# EAGLE board driver LF (EAGLE 7.6.0)
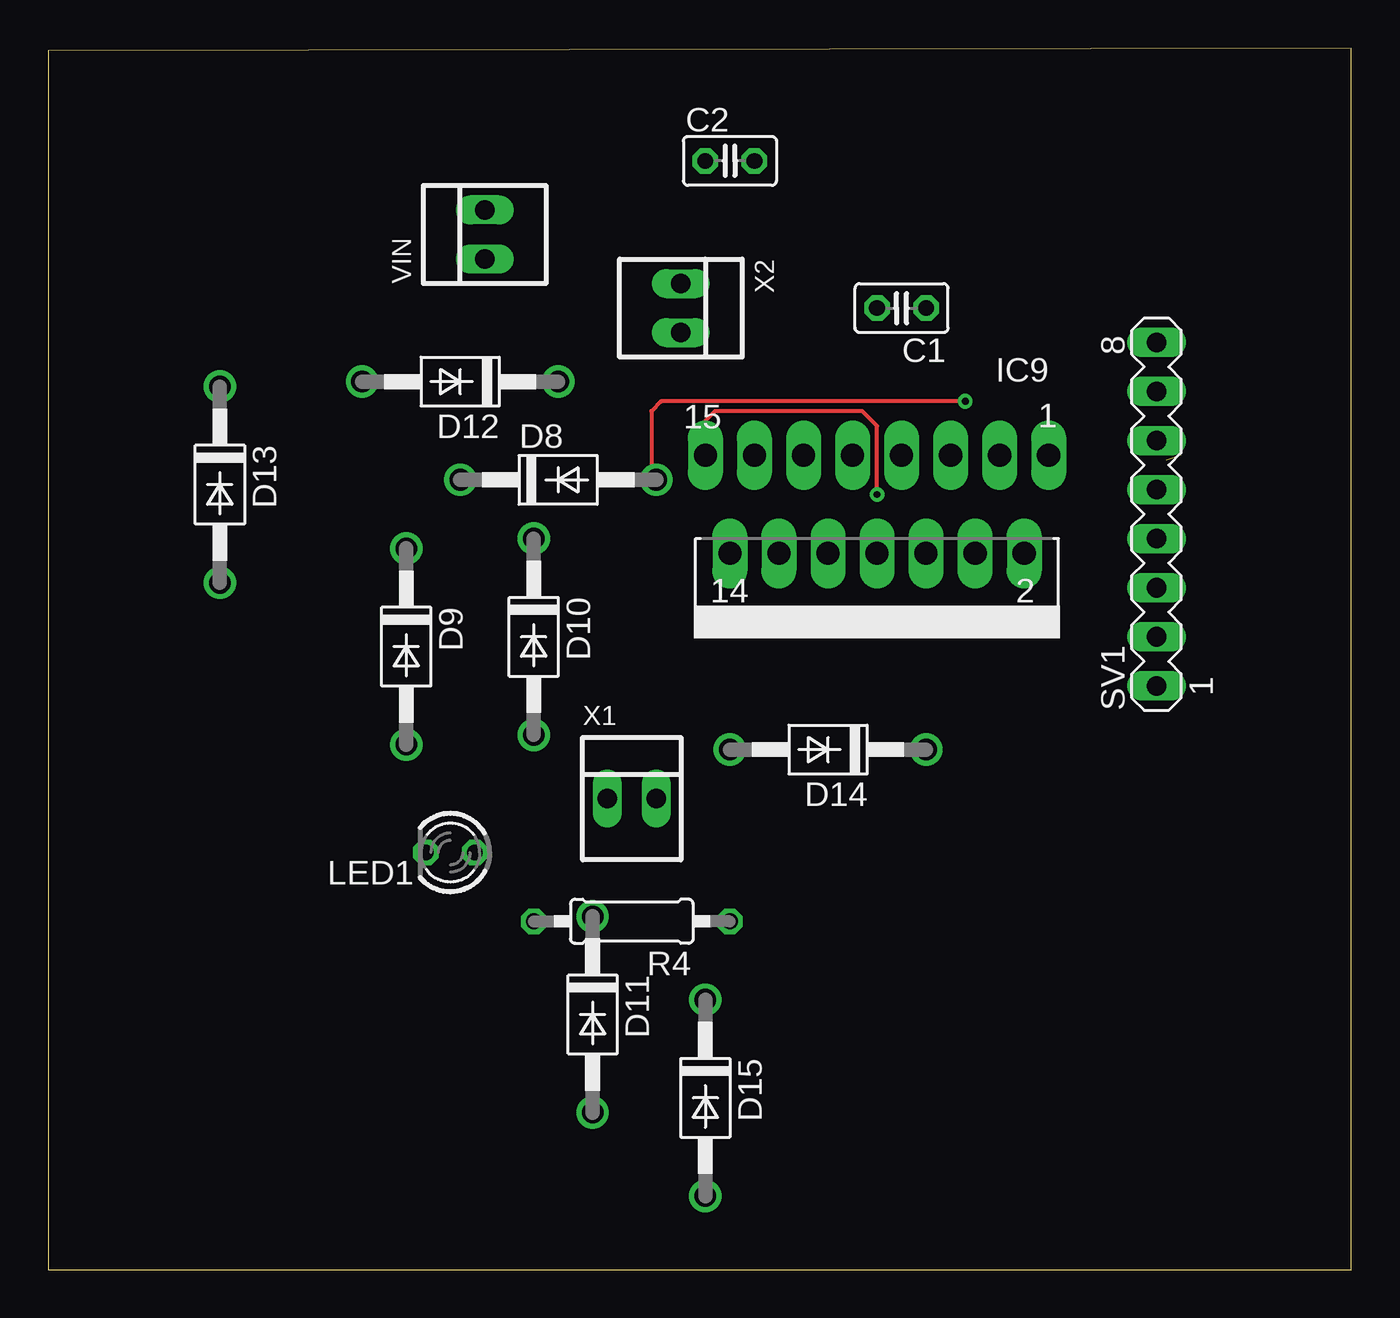
[diagram p0: board, top side]
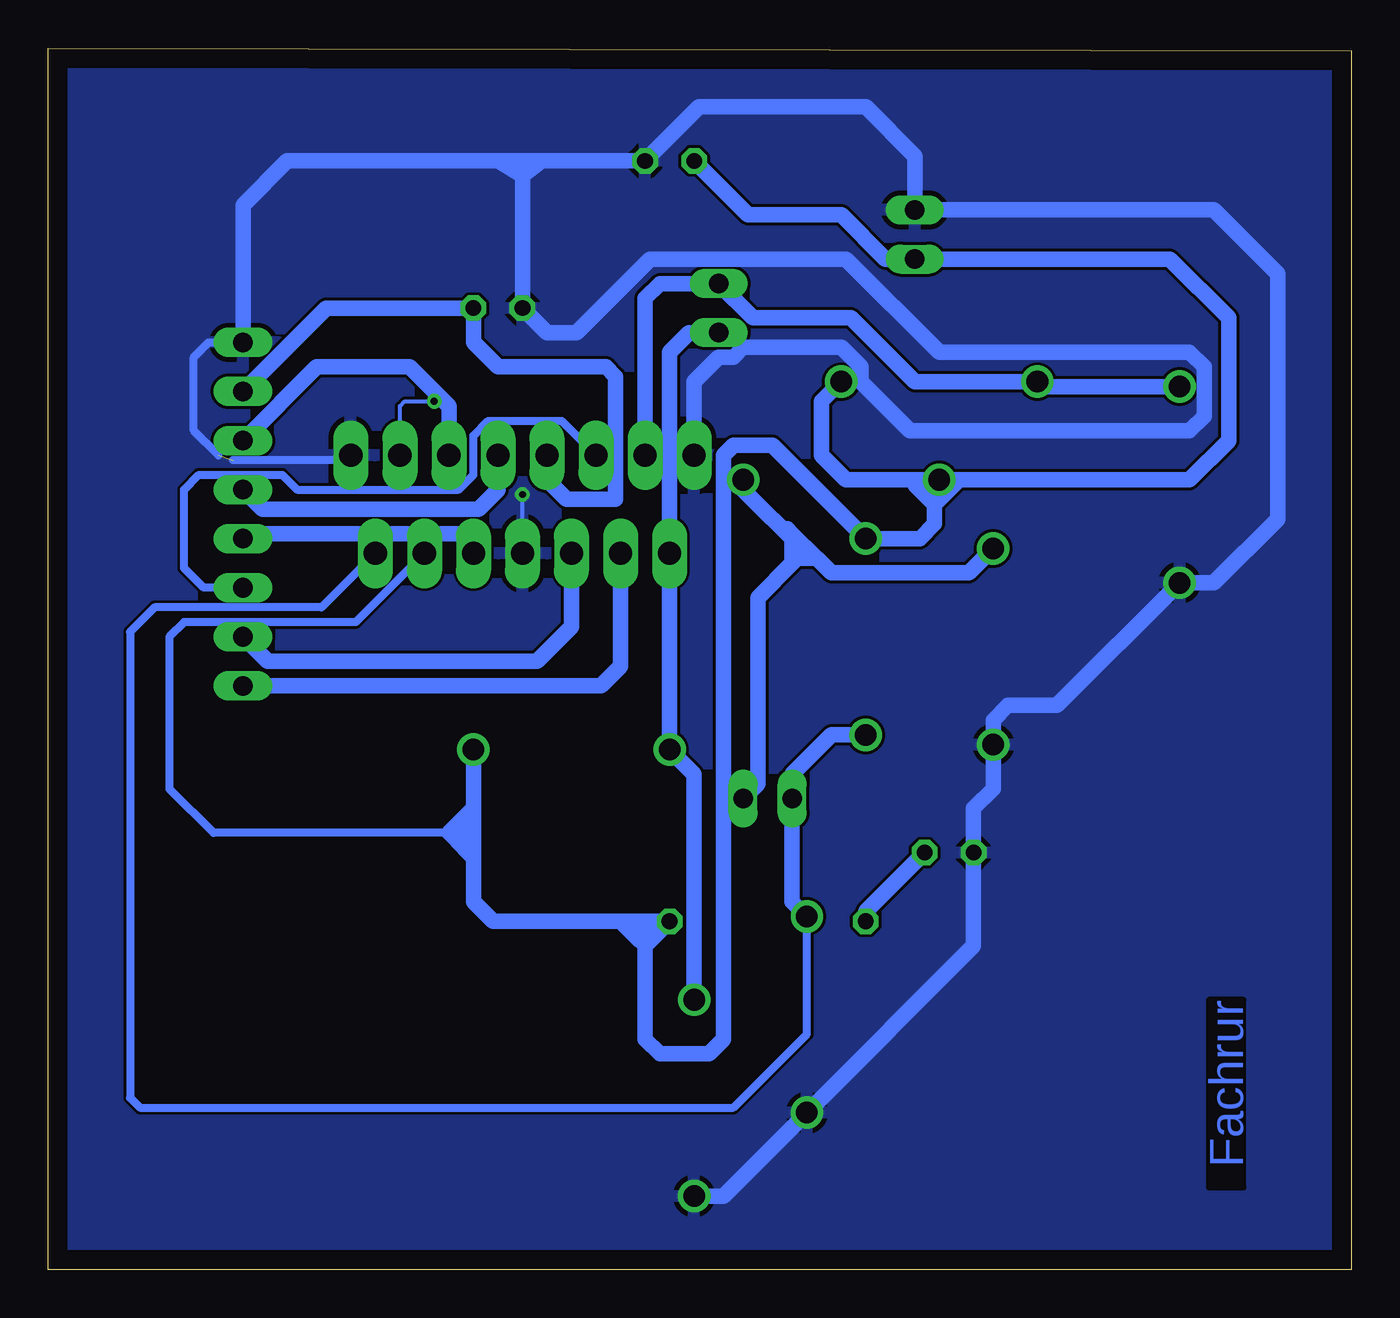
[diagram p1: board, bottom side, seen from below]

Size 67.49 x 63.24 mm. Coordinates in mm from the lower left corner, seen from the top.
Outline: 0,0 67.49,0 67.49,63.24 0,63.11 0,0
Copper layers (1*16): Top 0.035mm / dielectric 1.5mm / Bottom 0.035mm
Design rules "default": minimum track width 6mil, minimum drill 0.35mm, track to track 6mil, track to pad 6mil, pad to pad 6mil, via to via 6mil, smd to smd 6mil, copper to edge 40mil, drill to drill 6mil, minimum pad ring 10mil, minimum via ring 8mil, stop-mask expansion 4mil, vias tented up to drill 0mil, thermal gap 10mil

## Footprints (pad centres in the part's own frame; a part is rotated, then mirrored left to right if it is on the bottom)
C025-025X050 = drill 0.813 octagon: 1 -1.27,0; 2 1.27,0
DO41-10 = drill 1.118: A 5.08,0; C -5.08,0
MULTIWATT-15 = drill 1.2 long: 1 -8.89,-7.62; 2 -7.62,-2.54; 3 -6.35,-7.62; 4 -5.08,-2.54; 5 -3.81,-7.62; 6 -2.54,-2.54; 7 -1.27,-7.62; 8 0,-2.54; 9 1.27,-7.62; 10 2.54,-2.54; 11 3.81,-7.62; 12 5.08,-2.54; 13 6.35,-7.62; 14 7.62,-2.54; 15 8.89,-7.62
LED3MM = drill 0.813 octagon: A -1.27,0; K 1.27,0
0207/10 = drill 0.813 octagon: 1 -5.08,0; 2 5.08,0
MA08-1 = drill 1.016 long: 1 -8.89,0; 2 -6.35,0; 3 -3.81,0; 4 -1.27,0; 5 1.27,0; 6 3.81,0; 7 6.35,0; 8 8.89,0
22-23-2021 = drill 1 long: 1 -1.27,0; 2 1.27,0

## Placement (x,y rotation side)
C1  100nF  [C025-025X050]  44.2,49.78 180 top
C2  100nF  [C025-025X050]  35.31,57.4 0 top
D8  1N4004  [DO41-10]  26.42,40.89 0 top
D9  1N4004  [DO41-10]  18.54,32.26 270 top
D10  1N4004  [DO41-10]  25.15,32.77 270 top
D11  1N4004  [DO41-10]  28.19,13.21 270 top
D12  1N4004  [DO41-10]  21.34,45.97 180 top
D13  1N4004  [DO41-10]  8.89,40.64 270 top
D14  1N4004  [DO41-10]  40.39,26.92 180 top
D15  1N4004  [DO41-10]  34.04,8.89 270 top
IC9  L298  [MULTIWATT-15]  42.93,34.54 180 top
LED1  [LED3MM]  20.83,21.59 180 top
R4  330  [0207/10]  30.23,18.03 180 top
SV1  [MA08-1]  57.4,39.12 90 top
VIN  22-23-2021  [22-23-2021]  22.61,53.59 90 top
X1  22-23-2021  [22-23-2021]  30.23,24.38 0 top
X2  22-23-2021  [22-23-2021]  32.77,49.78 270 top

## Library data of the parts
C1 C2 R4 = rcl
D8-D15 = diode
IC9 = st-microelectronics
LED1 = led
SV1 = con-lstb; OC_FARNELL: unknown; OC_NEWARK: unknown
VIN X1 X2 = con-molex; MF: MOLEX; MPN: 22-23-2021; OC_FARNELL: 1462926; OC_NEWARK: 25C3832

## Nets
GND: C1.2 C2.2 D9.A D11.A D13.A D15.A IC9.1 IC9.8 IC9.15 LED1.K SV1.8 VIN.2
N$1: IC9.5 SV1.6
N$3: IC9.7 SV1.5
N$5: IC9.12 SV1.1
N$8: IC9.10 SV1.2
N$16: IC9.6 SV1.4
N$17: IC9.11 SV1.3
N$44: LED1.A R4.2
N$204: D8.A D9.C IC9.3 X1.2
N$205: D10.A D11.C IC9.2 X1.1
N$206: D12.A D13.C IC9.13 X2.1
N$207: D14.A D15.C IC9.14 X2.2
VCC: C1.1 IC9.9 SV1.7
VDD: C2.1 D8.C D10.C D12.C D14.C IC9.4 R4.1 VIN.1

## Tracks (layer width: path | path; a pad name or v marks a point on that pad's centre or on a via)
GND  (via drill 0.35)  (1 unrouted)
  Top 0.203: IC9.15 34.04,43.94 34.54,44.45 42.16,44.45 42.93,43.69 v42.93,40.13
  Bottom 0.203: IC9.8 v42.93,40.13
  Bottom 0.406: 58.67,42.16 59.94,43.43 59.94,47.24 59.18,48.01 SV1.8 | IC9.1 52.07,41.91 57.91,41.91
  Bottom 0.813: 41.91,57.4 C2.2 33.78,60.2 25.15,60.2 22.61,57.66 VIN.2 7.11,54.86 3.81,51.56 3.81,38.86 7.11,35.56 D13.A 15.24,29.21 17.78,29.21 18.54,28.45 D9.A 18.54,24.89 19.56,23.88 LED1.K 19.56,16.76 D11.A 32.51,3.81 D15.A | 41.91,57.4 42.42,57.4 | SV1.8 57.4,55.12 55.12,57.4 44.2,57.4 | 42.93,56.64 42.42,57.4 | 44.2,57.4 42.42,57.4 | 41.91,57.4 42.93,56.64 | 42.93,56.64 44.2,57.4 | 42.93,56.64 C1.2 41.66,48.51 40.13,48.51 36.32,52.32 26.16,52.32 21.34,47.5 8.38,47.5 7.62,46.74 7.62,44.2 8.38,43.43 22.86,43.43 25.4,45.97 25.4,46.74 26.42,47.75 31.5,47.75 32,47.24 32.77,47.24 34.04,45.97 IC9.15
  pour Bottom: 0,63.25 67.44,63.25 67.44,0 0,0
N$1
  Bottom 0.813: SV1.6 53.59,46.74 48.77,46.74 46.74,44.7 IC9.5
N$3
  Bottom 0.813: SV1.5 56.39,39.37 45.21,39.37 44.2,40.39 IC9.7
N$5
  Bottom 0.813: IC9.12 37.85,31.24 38.86,30.23 SV1.1
N$8
  Bottom 0.813: SV1.2 56.13,31.5 42.16,31.5 40.39,33.27 IC9.10
N$16
  Bottom 0.813: SV1.4 57.15,38.1 46.23,38.1 45.47,37.34 IC9.6
N$17
  Bottom 0.406: SV1.3 59.44,35.31 60.45,36.32 60.45,40.39 59.69,41.15 55.37,41.15 54.61,40.39 46.23,40.39 45.47,41.15 45.47,43.18 44.7,43.94 40.89,43.94 IC9.11
N$44
  Bottom 0.813: LED1.A 25.15,18.54 R4.2
N$204  (via drill 0.35)
  Top 0.203: v47.5,44.96 31.75,44.96 31.24,44.45 31.24,41.15 D8.A
  Bottom 0.203: IC9.3 49.28,44.7 49.02,44.96 v47.5,44.96
  Bottom 0.813: D9.C 19.81,36.07 26.92,36.07 27.69,36.83 | 31.5,40.64 D8.A 31.5,40.39 28.45,37.34 28.45,37.08 28.7,36.83 | X1.2 30.73,25.15 30.73,34.8 28.96,36.58 | 28.96,36.58 28.7,36.83 | 28.7,36.83 27.69,36.83 | 27.69,36.83 28.96,38.1 | 29.21,38.35 28.96,38.1 | 28.96,38.1 28.96,36.58
N$205
  Bottom 0.406: 50.8,36.83 53.34,34.29 61.98,34.29 63.25,33.02 63.25,8.89 62.74,8.38 32,8.38 28.19,12.19 D11.C
  Bottom 0.813: IC9.2 50.8,36.83 | D11.C 28.96,19.05 X1.1 28.96,25.65 26.92,27.69 D10.A
N$206
  Bottom 0.813: D13.C 16,45.72 D12.A 22.61,45.97 25.91,49.28 30.99,49.28 X2.1 35.81,51.05 36.58,50.29 IC9.13
N$207
  Bottom 0.406: 35.56,26.92 D14.A
  Bottom 0.813: X2.2 34.29,48.51 35.31,47.5 IC9.14 D14.A 34.04,25.65 D15.C
VCC
  Bottom 0.813: SV1.7 53.09,49.78 C1.1 45.47,48.01 44.2,46.74 38.61,46.74 38.1,46.23 38.1,39.88 40.64,39.88 41.66,40.89 IC9.9
VDD
  Bottom 0.406: 45.72,26.67 D14.C | IC9.4 51.56,33.53 60.45,33.53 61.21,32.77 61.21,24.89 58.93,22.61 46.48,22.61 45.97,22.1 45.47,22.1
  Bottom 0.813: C2.1 31.24,54.61 26.42,54.61 24.13,52.32 VIN.1 9.4,52.32 6.35,49.28 6.35,42.93 8.38,40.89 20.32,40.89 | 20.32,40.89 D8.C | D12.C 27.43,44.96 27.43,42.16 26.16,40.89 22.61,40.89 | D8.C 21.59,40.64 21.59,39.62 | 21.59,39.62 22.61,40.64 22.61,40.89 | 22.61,40.89 D8.C | 20.32,40.89 21.59,39.62 | 21.59,39.62 21.59,38.61 22.35,37.85 D10.C 29.97,42.67 32,42.67 32.51,42.16 32.51,11.94 33.27,11.18 35.81,11.18 36.58,11.94 36.58,16.76 36.32,17.02 | 36.32,17.02 R4.1 37.85,18.03 36.83,17.02 36.32,17.02 | 36.32,17.02 36.58,17.27 36.58,17.53 37.08,18.03 44.45,18.03 45.47,19.05 45.47,21.34 | 45.47,21.34 45.47,22.1 45.47,23.88 46.74,22.61 45.97,21.84 | 45.47,21.34 45.97,21.84 | 45.97,21.84 45.97,22.61 45.47,23.11 D14.C

## Text on the board
Bottom: Fachrur